# EAGLE board module_CKP_Hall (EAGLE 9.2.0)
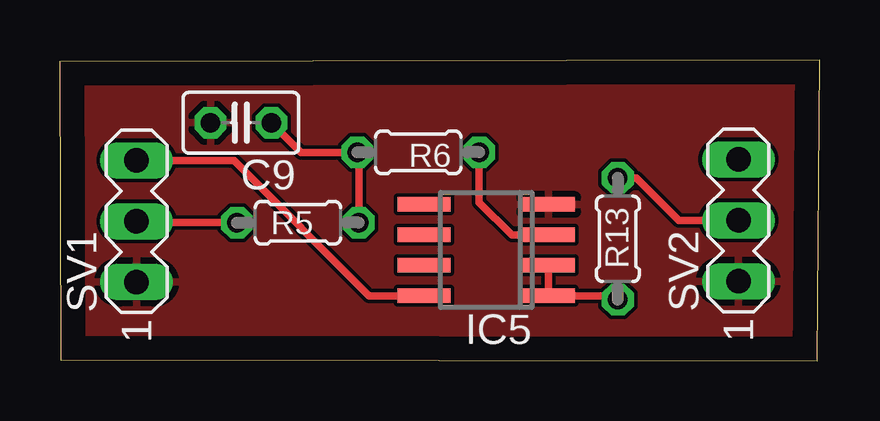
[diagram p0: board, top side]

Size 31.67 x 12.54 mm. Coordinates in mm from the lower left corner, seen from the top.
Outline: 0.03,0.03 31.58,0 31.67,12.54 0,12.48 0.03,0.03
Copper layers (1*16): Top 0.035mm / dielectric 1.5mm / Bottom 0.035mm
Design rules "default": minimum track width 6mil, minimum drill 0.35mm, track to track 6mil, track to pad 6mil, pad to pad 6mil, via to via 6mil, smd to smd 6mil, copper to edge 40mil, drill to drill 6mil, minimum pad ring 10mil, minimum via ring 8mil, stop-mask expansion 4mil, vias tented up to drill 0mil, thermal gap 10mil

## Footprints (pad centres in the part's own frame; a part is rotated, then mirrored left to right if it is on the bottom)
C025-025X050 = drill 0.813 octagon: 1 -1.27,0; 2 1.27,0
SO08 = smd 0.6 x 2.2: 1 -1.905,-2.6; 2 -0.635,-2.6; 3 0.635,-2.6; 4 1.905,-2.6; 5 1.905,2.6; 6 0.635,2.6; 7 -0.635,2.6; 8 -1.905,2.6
0204/5 = drill 0.813 octagon: 1 -2.54,0; 2 2.54,0
MA03-1 = drill 1.016 long: 1 -2.54,0; 2 0,0; 3 2.54,0

## Placement (x,y rotation side)
C9  [C025-025X050]  7.54,9.92 180 top
IC5  LM358D  [SO08]  17.77,4.62 90 top
R5  2k  [0204/5]  9.92,5.75 0 top
R6  1.5k  [0204/5]  14.94,8.69 0 top
R13  1.5k  [0204/5]  23.26,5.08 90 top
SV1  [MA03-1]  3.19,5.81 90 top
SV2  [MA03-1]  28.29,5.85 90 top

## Library data of the parts
C9 = rcl; SPICEPREFIX: C
IC5 = linear
R5 R6 R13 = rcl; SPICEPREFIX: R
SV1 SV2 = con-lstb; OC_FARNELL: unknown; OC_NEWARK: unknown

## Nets
5V: IC5.8 SV1.3
CKPIN: R5.1 SV1.2
CKPOUT: R13.2 SV2.2
CPKOUT: IC5.1 IC5.2 R13.1
GND: C9.2 IC5.4 SV1.1 SV2.1
N$2: SV2.3
N$5: IC5.3 R6.2
N$6: C9.1 R5.2 R6.1

## Tracks (layer width: path | path; a pad name or v marks a point on that pad's centre or on a via)
5V
  Top 0.305: IC5.8 12.9,2.71 7.25,8.35 SV1.3
CKPIN
  Top 0.305: R5.1 3.25,5.75 SV1.2
CKPOUT
  Top 0.305: R13.2 24.03,7.62 25.8,5.85 SV2.2
CPKOUT
  Top 0.305: R13.1 23.09,2.71 IC5.1 IC5.2
GND
  pour Top: -2.2,12.35 30.35,12.35 36.9,5.81 30.52,-0.56 -2.2,-0.56
N$5
  Top 0.305: IC5.3 18.83,5.25 17.48,6.61 R6.2
N$6
  Top 0.305: R5.2 12.46,8.63 R6.1 12.38,8.67 10.06,8.67 C9.1